# EAGLE board arduino boardv2 (EAGLE 6.1)
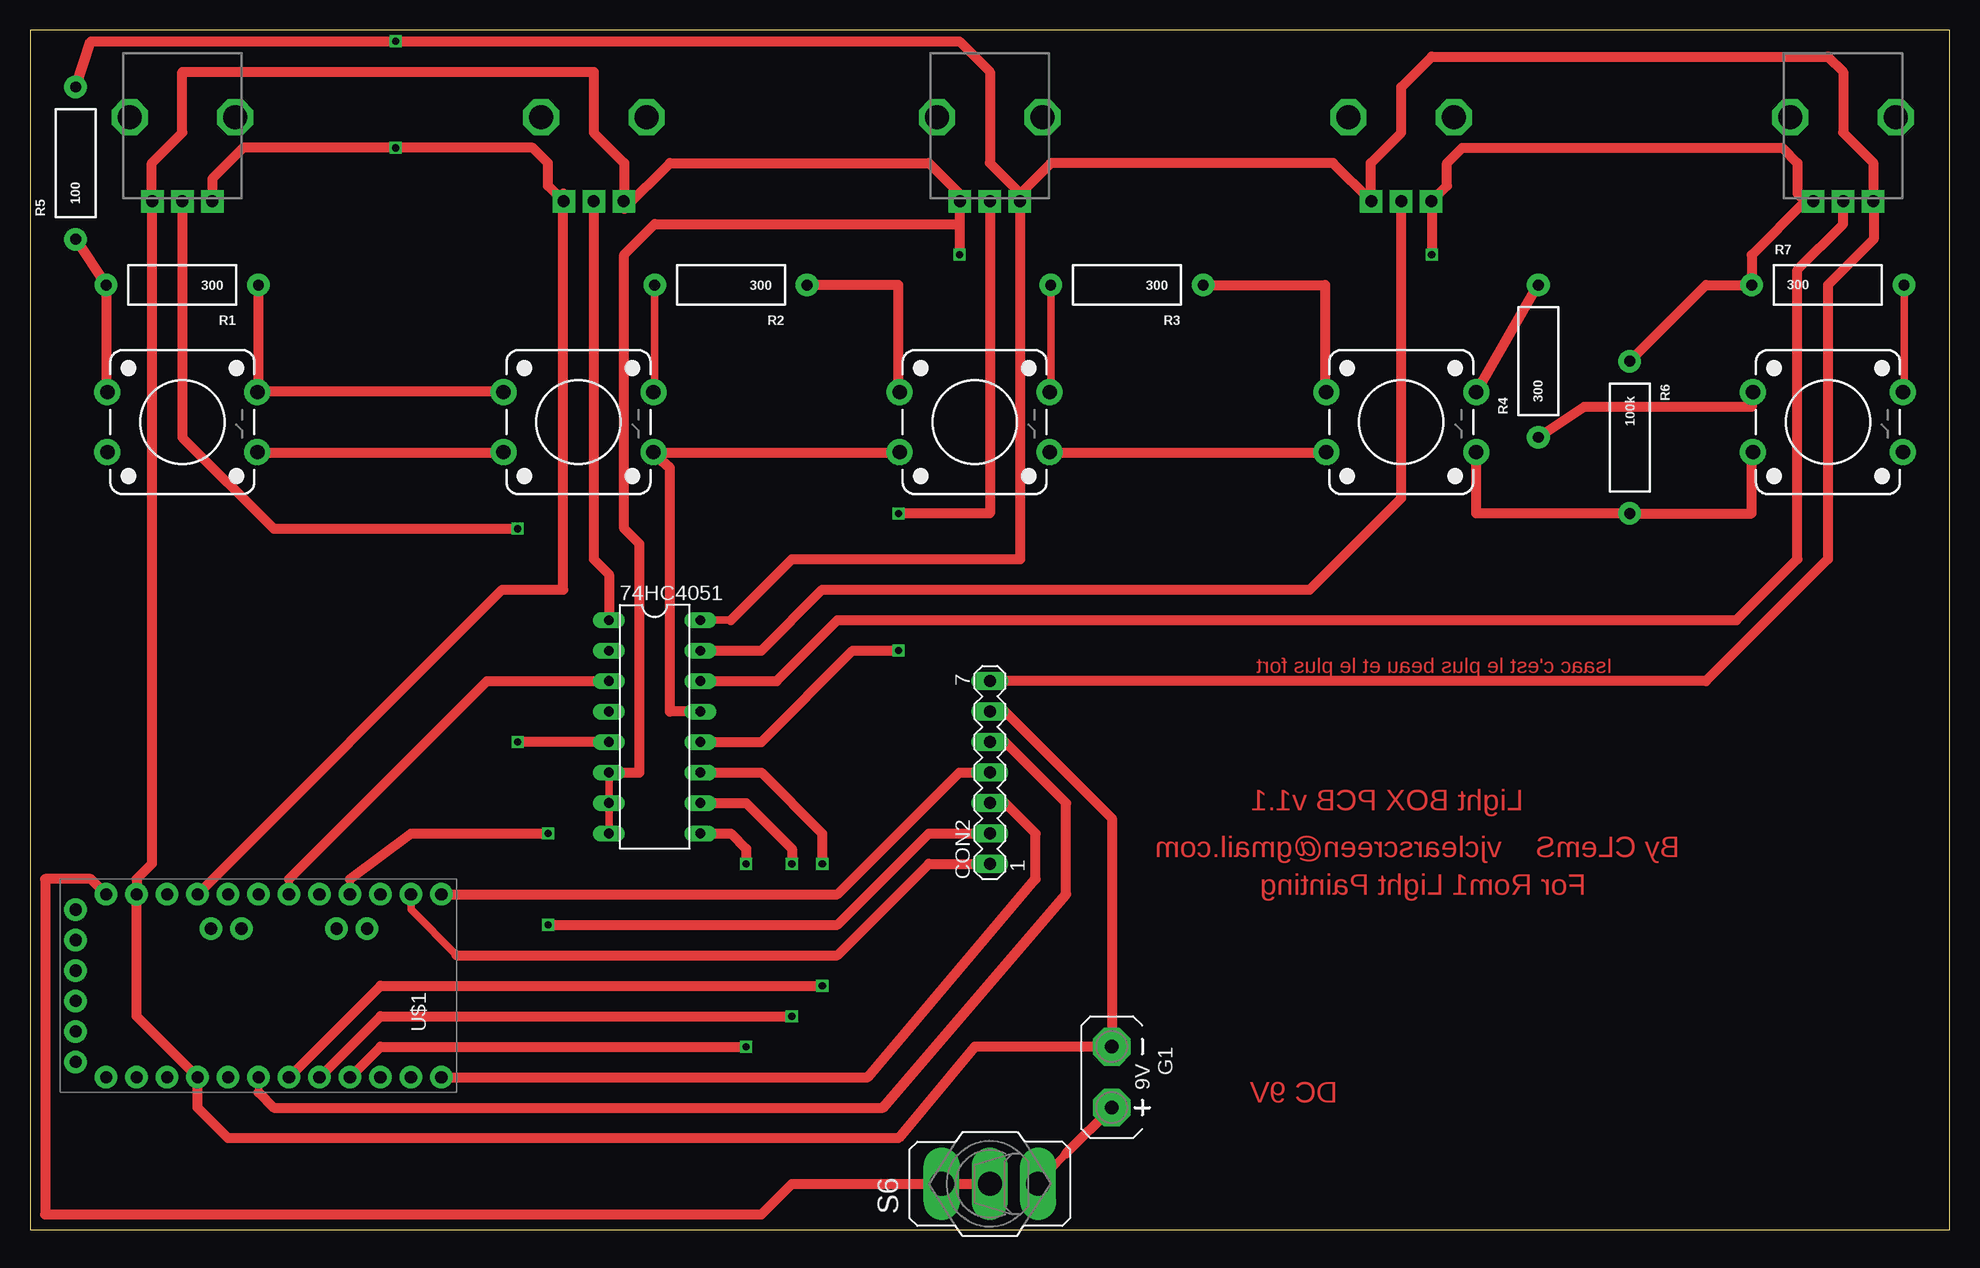
[diagram p0: board, top side]
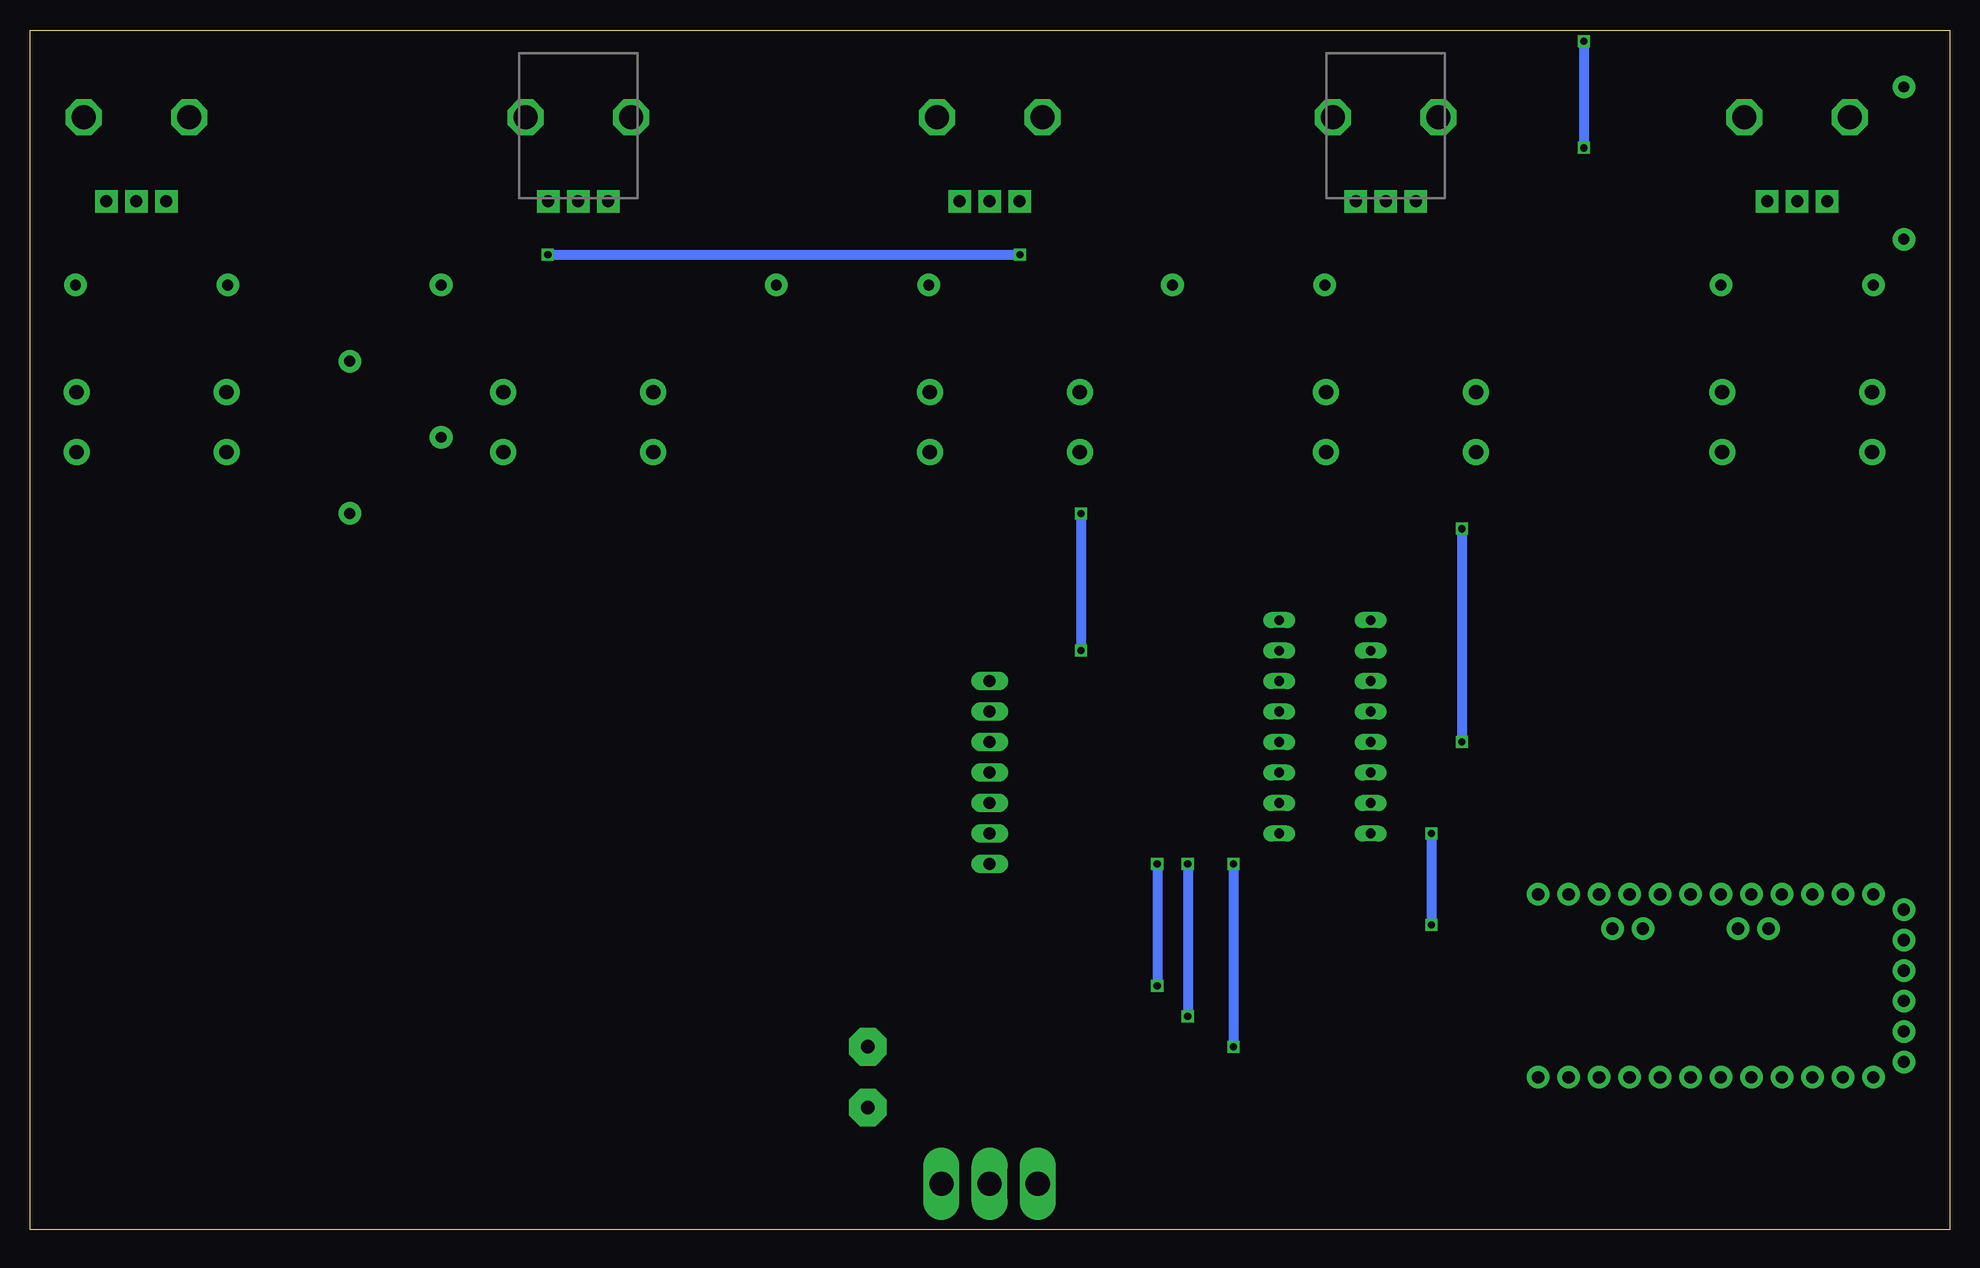
[diagram p1: board, bottom side, seen from below]

Size 160 x 100 mm. Coordinates in mm from the lower left corner, seen from the top.
Outline: 0,0 160,0 160,100 0,100 0,0
Copper layers (1*16): Top 0.035mm / dielectric 1.5mm / Bottom 0.035mm
Design rules: minimum track width 25mil, minimum drill 40mil, track to track 30mil, track to pad 30mil, pad to pad 15mil, via to via 30mil, smd to smd 8mil, copper to edge 40mil, drill to drill 20mil, minimum pad ring 10mil, minimum via ring 8mil, stop-mask expansion 4mil, vias tented up to drill 0mil, thermal gap 10mil

## Footprints (pad centres in the part's own frame; a part is rotated, then mirrored left to right if it is on the bottom)
DIL16 = drill 0.813 long: 1 -8.89,-3.81; 2 -6.35,-3.81; 3 -3.81,-3.81; 4 -1.27,-3.81; 5 1.27,-3.81; 6 3.81,-3.81; 7 6.35,-3.81; 8 8.89,-3.81; 9 8.89,3.81; 10 6.35,3.81; 11 3.81,3.81; 12 1.27,3.81; 13 -1.27,3.81; 14 -3.81,3.81; 15 -6.35,3.81; 16 -8.89,3.81
MA07-1 = drill 1.016 long: 1 -7.62,0; 2 -5.08,0; 3 -2.54,0; 4 0,0; 5 2.54,0; 6 5.08,0; 7 7.62,0
AB9V = drill 1.118 pad 3.15 octagon: + 0,2.54; - 0,-2.54
AXIAL-0.5 = drill 0.9 pad 1.88: P$1 -6.35,0; P$2 6.35,0
ALPS_POT = drill 1 pad 1.88 square: P$1 7,-2.5; P$2 7,0; P$3 7,2.5 | drill 2 octagon: P$4 0,-4.4; P$5 0,4.4
TACTILE-PTH-12MM = drill 1.2 pad 2.159: 1 6.25,-2.5; 2 -6.25,-2.5; 3 6.25,2.5; 4 -6.25,2.5
320-916 = drill 2.007 long: 1 0,4.013; 2 0,0; 3 0,-4.013
ARDUINO_PRO_MINI = drill 1.016 pad 1.88: 1 -7.62,12.7; 2 -7.62,10.16; 3 -7.62,7.62; 4 -7.62,5.08; 5 -7.62,2.54; 6 -7.62,0; 7 -7.62,-2.54; 8 -7.62,-5.08; 9 -7.62,-7.62; 10 -7.62,-10.16; 11 -7.62,-12.7; 12 -7.62,-15.24; 13 7.62,-15.24; 14 7.62,-12.7; 15 7.62,-10.16; 16 7.62,-7.62; 17 7.62,-5.08; 18 7.62,-2.54; 19 7.62,0; 20 7.62,2.54; 21 7.62,5.08; 22 7.62,7.62; 23 7.62,10.16; 24 7.62,12.7; A4 4.763,1.429; A5 4.763,3.969; A6 4.763,-9.049; A7 4.763,-6.509; BLK -6.35,15.24; GND -3.81,15.24; GRN 6.35,15.24; RXI 1.27,15.24; TXO 3.81,15.24; VCC -1.27,15.24

## Placement (x,y rotation side)
74HC4051  4051N  [DIL16]  52.07,41.91 270 top
CON2  CON2  [MA07-1]  80.01,38.1 90 top
G1  AB9V  [AB9V]  90.17,12.7 180 top
R1  300  [AXIAL-0.5]  12.7,78.74 180 top
R2  300  [AXIAL-0.5]  58.42,78.74 180 top
R3  300  [AXIAL-0.5]  91.44,78.74 180 top
R4  300  [AXIAL-0.5]  125.73,72.39 90 top
R5  100  [AXIAL-0.5]  3.81,88.9 90 top
R6  100k  [AXIAL-0.5]  133.35,66.04 270 top
R7  300  [AXIAL-0.5]  149.86,78.74 0 top
RV1  1k  [ALPS_POT]  12.7,92.71 270 top
RV2  1k  [ALPS_POT]  46.99,92.71 270 bottom
RV3  1k  [ALPS_POT]  80.01,92.71 270 top
RV4  1k  [ALPS_POT]  114.3,92.71 270 bottom
RV5  1k  [ALPS_POT]  151.13,92.71 270 top
S1  SWITCH-MOMENTARY-212MM  [TACTILE-PTH-12MM]  12.7,67.31 0 top
S2  SWITCH-MOMENTARY-212MM  [TACTILE-PTH-12MM]  45.72,67.31 0 top
S3  SWITCH-MOMENTARY-212MM  [TACTILE-PTH-12MM]  78.74,67.31 0 top
S4  SWITCH-MOMENTARY-212MM  [TACTILE-PTH-12MM]  114.3,67.31 0 top
S5  SWITCH-MOMENTARY-212MM  [TACTILE-PTH-12MM]  149.86,67.31 0 top
S6  ON/OFF  [320-916]  80.01,3.81 90 top
U$1  ARDUINO_PRO_MINI  [ARDUINO_PRO_MINI]  19.05,20.32 90 top

## Library data of the parts
74HC4051 = 40xx
CON2 = con-lstb; OC_FARNELL: unknown; OC_NEWARK: unknown
G1 = battery
R1-R7 = SparkFun-Passives
RV1-RV5 = SparkFun-Electromechanical; PROD_ID: RES-09177
S1-S5 = SparkFun-Electromechanical; PROD_ID: SWCH-09185
S6 = switch
U$1 = SparkFun-Boards

## Nets
A1: 74HC4051.3 U$1.18
D3_GSCLK: CON2.5 U$1.6
D4_A_S0: 74HC4051.11 U$1.7
D5_B_S1: 74HC4051.10 U$1.8
D6_C_S2: 74HC4051.9 U$1.9
D9_XLAT: CON2.3 U$1.12
D10_BLANK: CON2.4 U$1.13
D11_SIN: CON2.1 U$1.14
D13_SCLK: CON2.2 U$1.16
GND: 74HC4051.6 74HC4051.7 74HC4051.8 CON2.6 G1.- R6.P$1 R7.P$1 RV1.P$1 RV2.P$1 RV3.P$1 RV4.P$1 RV5.P$1 U$1.4 U$1.23
N$1: S6.2 U$1.24
N$2: R1.P$2 R5.P$1
N$3: R1.P$1
N$4: R2.P$1
N$5: R4.P$2 S4.3
N$6: R4.P$1
N$7: G1.+ S6.3
POT1: 74HC4051.5 RV1.P$2
POT2: 74HC4051.1 RV2.P$2
POT3: 74HC4051.12 RV3.P$2
POT4: 74HC4051.15 RV4.P$2
POT5: 74HC4051.14 RV5.P$2
S$2: 74HC4051.13 S2.1
S$6: R2.P$2 S2.3
S$7: S1.3
S$8: R3.P$1
S$9: R3.P$2 S3.3
S$10: R7.P$2 S5.3
S$11: S5.1
SWITCH_IN: R6.P$2 S4.1
VCC: 74HC4051.16 CON2.7 R5.P$2 RV1.P$3 RV2.P$3 RV3.P$3 RV4.P$3 RV5.P$3 U$1.21

## Tracks (layer width: path | path; a pad name or v marks a point on that pad's centre or on a via)
A1
  Top 0.635: U$1.18 21.59,29.21
  Top 0.813: 74HC4051.3 38.1,45.72 21.59,29.21
D3_GSCLK
  Top 0.635: 81.28,40.64 CON2.5 | U$1.6 19.05,11.43
  Top 0.813: 81.28,40.64 86.36,35.56 86.36,27.94 71.12,10.16 20.32,10.16 19.05,11.43
D4_A_S0  (via drill 0.6)
  Top 0.813: 74HC4051.11 60.96,38.1 66.04,33.02 v66.04,30.48 | U$1.7 29.21,20.32 v66.04,20.32
  Bottom 0.813: v66.04,30.48 v66.04,20.32
D5_B_S1  (via drill 0.6)
  Top 0.813: 74HC4051.10 59.69,35.56 63.5,31.75 v63.5,30.48 | U$1.8 29.21,17.78 v63.5,17.78
  Bottom 0.813: v63.5,30.48 v63.5,17.78
D6_C_S2  (via drill 0.6)
  Top 0.813: 74HC4051.9 58.42,33.02 59.69,31.75 v59.69,30.48 | U$1.9 29.21,15.24 v59.69,15.24
  Bottom 0.813: v59.69,30.48 v59.69,15.24
D9_XLAT
  Top 0.635: 81.28,35.56 CON2.3
  Top 0.813: 81.28,35.56 83.82,33.02 83.82,29.21 69.85,12.7 U$1.12
D10_BLANK
  Top 0.813: U$1.13 67.31,27.94 77.47,38.1 CON2.4
D11_SIN
  Top 0.635: 35.56,22.86 31.75,26.67 U$1.14
  Top 0.813: CON2.1 74.93,30.48 67.31,22.86 35.56,22.86
D13_SCLK  (via drill 0.6)
  Top 0.635: U$1.16 26.67,29.21
  Top 0.813: CON2.2 74.93,33.02 67.31,25.4 v43.18,25.4 | v43.18,33.02 31.75,33.02 26.67,29.21
  Bottom 0.813: v43.18,33.02 v43.18,25.4
GND  (via drill 0.6)
  Top 0.635: 74HC4051.8 74HC4051.7 74HC4051.6 | 81.28,43.18 CON2.6 | 77.47,86.36 RV3.P$1 | 49.53,86.36 RV2.P$1
  Top 0.813: RV1.P$1 10.16,85.75 | 10.16,85.75 10.16,88.9 12.7,91.44 12.7,96.52 46.99,96.52 46.99,91.44 49.53,88.9 49.53,86.36 49.53,85.09 53.34,88.9 74.93,88.9 77.47,86.36 77.47,83.82 | 147.97,85.71 147.32,86.36 147.32,88.9 146.05,90.17 119.38,90.17 118.11,88.9 118.11,87.02 RV4.P$1 116.84,85.67 v116.84,81.28 | 147.97,85.71 RV5.P$1 | 147.97,85.71 143.51,81.25 R7.P$1 139.7,78.74 R6.P$1 | 77.47,83.82 v77.47,81.28 | 74HC4051.6 50.8,38.1 50.8,57.15 49.53,58.42 49.53,81.28 52.07,83.82 77.47,83.82 | 10.16,85.75 10.16,30.48 8.89,29.21 U$1.23 8.89,17.78 U$1.4 13.97,10.16 16.51,7.62 72.39,7.62 78.74,15.24 G1.- 90.17,34.29 81.28,43.18
  Bottom 0.813: v116.84,81.28 v77.47,81.28
N$1
  Top 0.813: U$1.24 5.08,29.21 1.27,29.21 1.27,1.27 60.96,1.27 63.5,3.81 S6.2
N$2
  Top 0.813: R5.P$1 R1.P$2 6.35,69.85
N$3
  Top 0.813: 39.37,69.85 19.05,69.85 R1.P$1
N$4
  Top 0.635: 68.58,78.74 R2.P$1
  Top 0.813: 72.39,69.85 72.39,78.74 R2.P$1
N$5
  Top 0.813: S4.3 125.73,78.8 R4.P$2
N$6
  Top 0.813: 143.51,69.85 143.51,68.58 129.54,68.58 R4.P$1
N$7
  Top 0.635: 86.36,6.35 S6.3
  Top 0.813: G1.+ 86.36,6.35
POT1  (via drill 0.6)
  Top 0.813: 74HC4051.5 v40.64,40.64 | RV1.P$2 12.7,66.04 20.32,58.42 v40.64,58.42
  Bottom 0.813: v40.64,58.42 v40.64,40.64
POT2
  Top 0.813: RV2.P$2 46.99,55.88 48.26,54.61 74HC4051.1
POT3  (via drill 0.6)
  Top 0.813: RV3.P$2 80.01,59.69 v72.39,59.69 | 74HC4051.12 60.96,40.64 68.58,48.26 v72.39,48.26
  Bottom 0.813: v72.39,59.69 v72.39,48.26
POT4
  Top 0.813: 74HC4051.15 60.96,48.26 66.04,53.34 106.68,53.34 114.3,60.96 RV4.P$2
POT5
  Top 0.813: RV5.P$2 151.13,83.82 147.32,80.01 147.32,55.88 142.24,50.8 67.31,50.8 62.23,45.72 74HC4051.14
S$2
  Top 0.813: 74HC4051.13 53.34,43.18 53.34,63.5 51.97,64.67 S2.1
S$3
  Top 0.813: 19.05,64.77 39.37,64.77
S$4
  Top 0.813: 52.07,64.77 72.39,64.77
S$5
  Top 0.813: 85.09,64.77 107.95,64.77
S$6
  Top 0.635: S2.3 52.07,69.85 R2.P$2
S$7
  Top 0.635: 19.05,69.85 S1.3
S$8
  Top 0.813: R3.P$1 107.95,78.74 107.95,69.85
S$9
  Top 0.635: R3.P$2 85.09,69.85 S3.3
S$10
  Top 0.635: R7.P$2 156.21,69.85 S5.3
S$11
  Top 0.635: 156.21,64.77 S5.1
SWITCH_IN
  Top 0.813: S4.1 120.55,59.69 R6.P$2 143.51,59.69 143.51,64.77
VCC  (via drill 0.6)
  Top 0.635: 58.42,50.8 74HC4051.16 | 44.45,85.09 RV2.P$3 | 153.67,85.09 153.67,86.36 RV5.P$3
  Top 0.813: RV2.P$3 43.18,87.02 43.18,88.9 41.91,90.17 v30.48,90.17 17.78,90.17 15.2,87.59 RV1.P$3 | 82.55,86.36 85.09,88.9 108.61,88.9 RV4.P$3 111.76,85.75 111.76,88.9 114.3,91.44 114.3,95.25 116.84,97.79 149.86,97.79 151.13,96.52 151.13,91.44 153.63,88.94 RV5.P$3 | 82.55,86.36 82.51,86.32 RV3.P$3 82.51,86.4 80.01,88.9 80.01,96.52 77.47,99.06 v30.48,99.06 5.08,99.06 R5.P$2 | U$1.21 39.37,53.34 44.45,53.34 44.45,85.09 44.45,86.36 | 153.67,85.09 153.67,82.55 149.86,78.74 149.86,55.88 139.7,45.72 CON2.7 | 58.42,50.8 63.5,55.88 82.55,55.88 82.55,86.36
  Bottom 0.813: v30.48,99.06 v30.48,90.17

## Text on the board
Top: Isaac c'est le plus beau et le plus fort | Light BOX PCB v1.1 | By CLemS vjclearscreen@gmail.com | For Rom1 Light Painting | DC 9V